# EAGLE board mixer (EAGLE 9.6.2)

Size 142 x 128.03 mm. Coordinates in mm from the lower left corner, seen from the top.
Outline: 4,128 137,128 arc-90 142,124 142,4 arc-90 138,0 126,0 arc-90 122,4 122,14 arc90 118,18 66,18 arc90 62,14 62,4 arc-90 58,0 4,0 arc-90 0,4 0,124 arc-90 4,128
Copper layers (1*16): Top 0.035mm / dielectric 1.5mm / Bottom 0.035mm
Design rules "default": minimum track width 6mil, minimum drill 0.35mm, track to track 6mil, track to pad 6mil, pad to pad 6mil, via to via 6mil, smd to smd 6mil, copper to edge 40mil, drill to drill 6mil, minimum pad ring 10mil, minimum via ring 8mil, stop-mask expansion 4mil, vias tented up to drill 0mil, thermal gap 10mil

## Footprints (pad centres in the part's own frame; a part is rotated, then mirrored left to right if it is on the bottom)
RK09L124000Z = drill 0.6 square: P$1 -2.5,0 | drill 0.6: P$2 0,0; P$3 2.5,0; P$6 -2.5,-2.54; P$7 0,-2.54; P$8 2.5,-2.54 | drill 2: P$4 -5.65,7.5; P$5 5.65,7.5
E2,0-6 = drill 0.813 long: + -0.953,0; - 0.953,0
E2,0-5 = drill 0.813 long: + -0.953,0; - 0.953,0
C025-025X050 = drill 0.813 octagon: 1 -1.27,0; 2 1.27,0
RK09L1140 = drill 0.6 square: P$1 -2.5,0 | drill 0.6: P$2 0,0; P$3 2.5,0 | drill 2: P$4 -5.65,7.5; P$5 5.65,7.5
RJ9W = drill 0.813 long: A 2.54,0.635; E -2.54,0.635; S 0,0.635
HOT_COLD = drill 0.6 square: P$1 -2.54,0 | drill 0.6: P$2 0,0; P$3 2.54,0
0204/7 = drill 0.813 octagon: 1 -3.81,0; 2 3.81,0
DIP762W53P254L1969H508Q14B = drill 0.743 pad 1.343: 1 -3.81,7.62; 2 -3.81,5.08; 3 -3.81,2.54; 4 -3.81,0; 5 -3.81,-2.54; 6 -3.81,-5.08; 7 -3.81,-7.62; 8 3.81,-7.62; 9 3.81,-5.08; 10 3.81,-2.54; 11 3.81,0; 12 3.81,2.54; 13 3.81,5.08; 14 3.81,7.62
SND_RET = drill 0.6 square: P$1 -2.54,0 | drill 0.6: P$2 0,0; P$3 2.54,0
3-HOLES = drill 0.6 square: P$1 -2.54,0 | drill 0.6: P$2 0,0; P$3 2.54,0
E5,0-12,5 = drill 1.016 pad 2.184: + -2.54,0 | drill 1.016 pad 2.184 octagon: - 2.54,0
DO41-10 = drill 1.118: A 5.08,0; C -5.08,0
DUOLED-A-5MM = drill 0.813 long: A 0,0; CR 2.54,0; CX -2.54,0
LEFT_RIGHT = drill 0.6 square: P$1 -2.54,0 | drill 0.6: P$2 0,0; P$3 2.54,0
PWR = drill 0.6 square: P$1 -1.27,0 | drill 0.6: P$2 1.27,0
LEFT_RIGHT_BYPASS = drill 0.6: BPSL 5.08,0; BPSR 7.62,0; LEFT 0,0; RIGHT 2.54,0 | drill 0.6 square: GND -2.54,0
CONV_V7809W-500R = drill 1.1 square: 1 -10.1,2.54 | drill 1.1: 2 -10.1,0; 3 -10.1,-2.54
BALANCED_INPUT_JACK = drill 0.6: GND 1.27,0 | drill 0.6 square: HOT -1.27,0
DIP762W53P254L2591H508Q20B = drill 0.743 pad 1.343: D1 -3.81,6.35; D2 -3.81,-6.35; D3 3.81,-6.35; D4 3.81,6.35; GND -3.81,-1.27; IN2 -3.81,-11.43; IN3 3.81,-11.43; IN4 3.81,11.43; NC 3.81,-1.27; S1A -3.81,8.89; S1B -3.81,3.81; S2A -3.81,-8.89; S2B -3.81,-3.81; S3A 3.81,-8.89; S3B 3.81,-3.81; S4A 3.81,8.89; S4B 3.81,3.81; VDD 3.81,1.27; VSS -3.81,1.27 | drill 0.743 pad 1.343 square: IN1 -3.81,11.43
DIP762W53P254L2006H508Q16B = drill 0.743 pad 1.343: D1 -3.81,3.81; D2 3.81,-3.81; GND -3.81,-3.81; IN2 3.81,-8.89; NC1 -3.81,-6.35; NC2 -3.81,-8.89; NC3 3.81,3.81; NC4 3.81,6.35; NC5 3.81,8.89; S1A -3.81,6.35; S1B -3.81,1.27; S2A 3.81,-6.35; S2B 3.81,-1.27; VDD 3.81,1.27; VSS -3.81,-1.27 | drill 0.743 pad 1.343 square: IN1 -3.81,8.89
SBC1-102-211 = drill 0.6 square: P$1 -1.27,0 | drill 0.6: P$2 1.27,0

## Placement (x,y rotation side)
1:BLEND  50 k  [RK09L124000Z]  23.05,72.05 0 top
1:C1  10u, 63V  [E2,0-6]  44.45,184.12 270 bottom  (outside the outline)
1:C2  10u, 63V  [E2,0-6]  52.09,184 270 bottom  (outside the outline)
1:C3  10u  [E2,0-5]  58.17,163.17 90 bottom  (outside the outline)
1:C4  18 p  [C025-025X050]  12.68,144.78 180 bottom  (outside the outline)
1:C5  10u  [E2,0-5]  60.71,169.52 90 bottom  (outside the outline)
1:C6  10u  [E2,0-5]  11.53,180.31 180 bottom  (outside the outline)
1:C7  10u  [E2,0-5]  17.73,180.32 0 bottom  (outside the outline)
1:C8  10u  [E2,0-5]  4.27,166.35 0 bottom  (outside the outline)
1:C9  10u  [E2,0-5]  -1.8,166.39 180 bottom  (outside the outline)
1:C10  10u  [E2,0-5]  30.63,142.26 180 bottom  (outside the outline)
1:C11  100 n  [C025-025X050]  7.64,151.08 0 bottom  (outside the outline)
1:C12  10u  [E2,0-5]  12.67,135.84 0 bottom  (outside the outline)
1:C17  18 p  [C025-025X050]  0.58,180.36 180 bottom  (outside the outline)
1:C19  18 p  [C025-025X050]  29.79,157.45 270 bottom  (outside the outline)
1:GAIN  10 k  [RK09L1140]  23.01,96.01 0 top
1:GAIN1  500 k  [RJ9W]  12.04,70 180 top
1:GAIN2  500 k  [RJ9W]  12.04,63.98 180 top
1:IN  HOT_COLD  [HOT_COLD]  80.05,112.01 0 bottom
1:LEVEL  RK09L1140  [RK09L1140]  22.97,24.01 0 top
1:R8  100 k  [0204/7]  13.92,185.35 0 bottom  (outside the outline)
1:R9  100 k  [0204/7]  0,171.45 0 bottom  (outside the outline)
1:R10  100 k  [0204/7]  -1.29,157.48 90 bottom  (outside the outline)
1:R11  47 k  [0204/7]  0.61,177.8 180 bottom  (outside the outline)
1:R12  1 k  [0204/7]  1.25,157.48 90 bottom  (outside the outline)
1:R13  2.2 k  [0204/7]  26.67,143.51 270 bottom  (outside the outline)
1:R14  47 k  [0204/7]  22.86,157.45 270 bottom  (outside the outline)
1:R15  2.2 k  [0204/7]  20.34,137.16 0 bottom  (outside the outline)
1:R16  100 k  [0204/7]  63.45,156.21 90 bottom  (outside the outline)
1:R17  100 k  [0204/7]  65.99,156.21 90 bottom  (outside the outline)
1:R18  1 k  [0204/7]  26.67,151.15 180 bottom  (outside the outline)
1:R19  10 k  [0204/7]  12.7,147.35 0 bottom  (outside the outline)
1:R20  10 k  [0204/7]  12.72,142.22 0 bottom  (outside the outline)
1:R21  10 k  [0204/7]  10.14,158.8 90 bottom  (outside the outline)
1:R22  10 k  [0204/7]  10.18,168.91 270 bottom  (outside the outline)
1:R23  100 k  [0204/7]  53.34,175.26 0 bottom  (outside the outline)
1:R24  100 k  [0204/7]  53.34,177.8 0 bottom  (outside the outline)
1:R25  4.7 k  [0204/7]  65.52,180.21 270 bottom  (outside the outline)
1:R26  1 k  [0204/7]  14.02,175.29 0 bottom  (outside the outline)
1:R27  4.7 k  [0204/7]  62.96,180.2 270 bottom  (outside the outline)
1:U1  TL074  [DIP762W53P254L1969H508Q14B]  49.5,120.65 270 bottom
1:U2  SEND_RETURN  [SND_RET]  29.91,95.13 90 bottom
2:BLEND  50 k  [RK09L124000Z]  54.95,71.93 0 top
2:C1  10u, 63V  [E2,0-6]  76.2,105.33 270 bottom
2:C2  10u, 63V  [E2,0-6]  86.97,105.36 270 bottom
2:C3  10u  [E2,0-5]  73.66,95.25 90 bottom
2:C4  18 p  [C025-025X050]  93.98,106.66 0 bottom
2:C5  10u  [E2,0-5]  79.99,95.28 90 bottom
2:C6  10u  [E2,0-5]  96.52,100.36 90 bottom
2:C7  10u  [E2,0-5]  102.87,102.87 270 bottom
2:C8  10u  [E2,0-5]  35.81,65.43 270 bottom
2:C9  10u  [E2,0-5]  35.81,71.78 270 bottom
2:C10  10u  [E2,0-5]  43.1,77.52 0 bottom
2:C11  100 n  [C025-025X050]  71.09,121.94 180 bottom
2:C12  10u  [E2,0-5]  43.18,54.61 0 bottom
2:C17  18 p  [C025-025X050]  71.12,119.38 0 bottom
2:C19  18 p  [C025-025X050]  -84.43,92.46 0 bottom  (outside the outline)
2:GAIN  10 k  [RK09L1140]  55.01,95.99 0 top
2:GAIN1  500 k  [RJ9W]  43.94,70.03 180 top
2:GAIN2  500 k  [RJ9W]  43.94,64.02 180 top
2:IN  HOT_COLD  [HOT_COLD]  107.05,112.09 0 bottom
2:LEVEL  RK09L1140  [RK09L1140]  54.97,23.99 0 top
2:R8  100 k  [0204/7]  100.33,111.76 270 bottom
2:R9  100 k  [0204/7]  32.99,59.69 180 bottom
2:R10  100 k  [0204/7]  67.31,113.01 0 bottom
2:R11  47 k  [0204/7]  67.31,121.92 270 bottom
2:R12  1 k  [0204/7]  67.31,115.55 0 bottom
2:R13  2.2 k  [0204/7]  43.18,72.39 180 bottom
2:R14  47 k  [0204/7]  -174.6,122.94 0 bottom  (outside the outline)
2:R15  2.2 k  [0204/7]  43.18,59.67 0 bottom
2:R16  100 k  [0204/7]  67.31,105.43 180 bottom
2:R17  100 k  [0204/7]  67.31,102.89 180 bottom
2:R18  1 k  [0204/7]  -133.96,122.94 0 bottom  (outside the outline)
2:R19  10 k  [0204/7]  94.01,111.73 180 bottom
2:R20  10 k  [0204/7]  94,109.22 0 bottom
2:R21  10 k  [0204/7]  93.95,114.3 180 bottom
2:R22  10 k  [0204/7]  80.03,114.28 0 bottom
2:R23  100 k  [0204/7]  74.93,100.33 180 bottom
2:R24  100 k  [0204/7]  86.36,100.33 0 bottom
2:R25  4.7 k  [0204/7]  67.31,110.49 180 bottom
2:R26  1 k  [0204/7]  68.6,96.52 270 bottom
2:R27  4.7 k  [0204/7]  67.31,107.95 180 bottom
2:U1  TL074  [DIP762W53P254L1969H508Q14B]  83.82,120.7 270 bottom
2:U2  SEND_RETURN  [SND_RET]  29.99,67.93 90 bottom
3:BLEND  50 k  [RK09L124000Z]  87.05,72.01 0 top
3:C1  10u, 63V  [E2,0-6]  129.54,106.6 270 bottom
3:C2  10u, 63V  [E2,0-6]  137.21,106.63 270 bottom
3:C3  10u  [E2,0-5]  127,99.03 90 bottom
3:C4  18 p  [C025-025X050]  128.55,115.59 270 bottom
3:C5  10u  [E2,0-5]  138.18,99.14 90 bottom
3:C6  10u  [E2,0-5]  119.99,111.76 0 bottom
3:C7  10u  [E2,0-5]  113.64,111.76 0 bottom
3:C8  10u  [E2,0-5]  35.53,38.05 270 bottom
3:C9  10u  [E2,0-5]  35.56,44.37 270 bottom
3:C10  10u  [E2,0-5]  74.9,77.47 0 bottom
3:C11  100 n  [C025-025X050]  99.06,121.92 180 bottom
3:C12  10u  [E2,0-5]  74.93,54.61 0 bottom
3:C17  18 p  [C025-025X050]  99.06,119.33 0 bottom
3:C19  18 p  [C025-025X050]  128.55,120.65 270 bottom
3:GAIN  10 k  [RK09L1140]  87.01,95.97 0 top
3:GAIN1  500 k  [RJ9W]  75.94,70.06 180 top
3:GAIN2  500 k  [RJ9W]  75.94,64.05 180 top
3:IN  HOT_COLD  [HOT_COLD]  134.05,111.97 0 bottom
3:LEVEL  RK09L1140  [RK09L1140]  86.97,24.07 0 top
3:R8  100 k  [0204/7]  124.46,110.52 90 bottom
3:R9  100 k  [0204/7]  39.98,40.69 90 bottom
3:R10  100 k  [0204/7]  120.63,102.84 90 bottom
3:R11  47 k  [0204/7]  95.25,120.65 90 bottom
3:R12  1 k  [0204/7]  118.09,102.84 90 bottom
3:R13  2.2 k  [0204/7]  74.91,72.39 180 bottom
3:R14  47 k  [0204/7]  133.38,124.48 180 bottom
3:R15  2.2 k  [0204/7]  74.9,59.59 0 bottom
3:R16  100 k  [0204/7]  139.09,118.11 270 bottom
3:R17  100 k  [0204/7]  136.52,118.11 270 bottom
3:R18  1 k  [0204/7]  106.68,114.27 180 bottom
3:R19  10 k  [0204/7]  125.75,120.62 270 bottom
3:R20  10 k  [0204/7]  43.18,175.26 180 bottom  (outside the outline)
3:R21  10 k  [0204/7]  123.19,120.65 90 bottom
3:R22  10 k  [0204/7]  106.68,104.14 270 bottom
3:R23  100 k  [0204/7]  131.42,99.01 90 bottom
3:R24  100 k  [0204/7]  133.99,99.01 90 bottom
3:R25  4.7 k  [0204/7]  133.98,118.11 270 bottom
3:R26  1 k  [0204/7]  109.24,104.14 270 bottom
3:R27  4.7 k  [0204/7]  131.47,118.11 270 bottom
3:U1  TL074  [DIP762W53P254L1969H508Q14B]  111.83,120.6 270 bottom
3:U2  SEND_RETURN  [SND_RET]  30.07,41.03 90 bottom
BLEND1  50 k  [RK09L124000Z]  119,72.02 0 top
BYPASS  BUTTON  [3-HOLES]  108.77,22.03 0 top
C1  10u  [E2,0-5]  -100.94,242.32 0 bottom  (outside the outline)
C2  10u  [E2,0-5]  -90.78,242.32 0 bottom  (outside the outline)
C3  10u  [E2,0-5]  -80.62,242.32 0 bottom  (outside the outline)
C4  10u  [E2,0-5]  -70.46,242.32 0 bottom  (outside the outline)
C5  10u  [E2,0-5]  -203.81,248.67 0 bottom  (outside the outline)
C6  10u, 63V  [E2,0-6]  -107.29,225.81 0 bottom  (outside the outline)
C7  10u, 63V  [E2,0-6]  -92.05,225.81 0 bottom  (outside the outline)
C8  10u  [E2,0-5]  -193.65,248.67 0 bottom  (outside the outline)
C9  10u  [E2,0-5]  -183.49,248.67 0 bottom  (outside the outline)
C10  10u  [E2,0-5]  -74.27,234.7 0 bottom  (outside the outline)
C11  10u  [E2,0-5]  -111.1,242.32 0 bottom  (outside the outline)
C12  10u, 63V  [E2,0-6]  -76.81,225.81 0 bottom  (outside the outline)
C13  10u  [E2,0-5]  -64.11,234.7 0 bottom  (outside the outline)
C14  10u  [E2,0-5]  -202.54,242.32 0 bottom  (outside the outline)
C15  10u  [E2,0-5]  -192.38,242.32 0 bottom  (outside the outline)
C16  10u  [E2,0-5]  -182.22,242.32 0 bottom  (outside the outline)
C17  18 p  [C025-025X050]  -109.83,234.7 0 bottom  (outside the outline)
C18  10u  [E2,0-5]  -172.06,242.32 0 bottom  (outside the outline)
C19  18 p  [C025-025X050]  -103.48,234.7 0 bottom  (outside the outline)
C20  10u  [E2,0-5]  -161.9,242.32 0 bottom  (outside the outline)
C21  10u, 63V  [E2,0-6]  -197.46,234.7 0 bottom  (outside the outline)
C22  10u  [E2,0-5]  -151.74,242.32 0 bottom  (outside the outline)
C23  10u, 63V  [E2,0-6]  -182.22,234.7 0 bottom  (outside the outline)
C24  10u, 63V  [E2,0-6]  -166.98,234.7 0 bottom  (outside the outline)
C25  10u, 63V  [E2,0-6]  -151.74,234.7 0 bottom  (outside the outline)
C26  10u  [E2,0-5]  -141.58,242.32 0 bottom  (outside the outline)
C27  2.2u, 63V  [E2,0-6]  -139.04,225.81 0 bottom  (outside the outline)
C28  100 n  [C025-025X050]  -122.53,234.7 0 bottom  (outside the outline)
C29  100 n  [C025-025X050]  -116.18,234.7 0 bottom  (outside the outline)
C30  2.2u, 63V  [E2,0-6]  -122.53,225.81 0 bottom  (outside the outline)
C31  390 u / 63 V  [E5,0-12,5]  42.3,22.35 180 bottom
C32  10u, 63V  [E2,0-6]  -136.5,234.7 0 bottom  (outside the outline)
C33  10u  [E2,0-5]  -131.42,242.32 0 bottom  (outside the outline)
C34  18 p  [C025-025X050]  -97.13,234.7 0 bottom  (outside the outline)
C35  18 p  [C025-025X050]  -90.78,234.7 0 bottom  (outside the outline)
C36  10u  [E2,0-5]  -121.26,242.32 0 bottom  (outside the outline)
C37  100 n  [C025-025X050]  -64.11,-4.06 0 bottom  (outside the outline)
C38  18 p  [C025-025X050]  -84.43,234.7 0 bottom  (outside the outline)
D1  1N4004  [DO41-10]  -67.92,11.18 0 bottom  (outside the outline)
D2  1N4004  [DO41-10]  -67.92,3.56 0 bottom  (outside the outline)
GAIN1  500 k  [RJ9W]  107.94,70.08 180 top
GAIN2  500 k  [RJ9W]  107.94,64 180 top
GAIN3  500 k  [RJ9W]  129.96,70.03 0 top
GAIN4  500 k  [RJ9W]  129.96,64.06 0 top
GAIN5  10 k  [RJ9W]  129.9,86 0 top
LD1  [DUOLED-A-5MM]  -155.55,225.81 0 bottom  (outside the outline)
LOOPMASTER  SEND_RETURN  [SND_RET]  29.97,14.06 90 bottom
MON_IN  HOT_COLD  [HOT_COLD]  111.97,41.1 90 bottom
MON_OUT  LEFT_RIGHT  [LEFT_RIGHT]  57.67,8.92 270 top
MON_THROUGH  HOT_COLD  [HOT_COLD]  106.47,29.48 90 bottom
MONO  BUTTON  [3-HOLES]  76.49,24.03 0 top
OUT_L  HOT_COLD  [HOT_COLD]  108.07,82.04 90 bottom
OUT_R  HOT_COLD  [HOT_COLD]  108.07,94.92 90 bottom
PWR$1  PWR  [PWR]  5.69,112.1 0 bottom
R1  10 k  [0204/7]  -73,247.4 0 bottom  (outside the outline)
R2  10 k  [0204/7]  -205.08,253.75 0 bottom  (outside the outline)
R3  10 k  [0204/7]  -194.92,253.75 0 bottom  (outside the outline)
R4  10 k  [0204/7]  -184.76,253.75 0 bottom  (outside the outline)
R5  100  [0204/7]  -174.6,253.75 0 bottom  (outside the outline)
R6  10 k  [0204/7]  -164.44,253.75 0 bottom  (outside the outline)
R7  100  [0204/7]  -154.28,253.75 0 bottom  (outside the outline)
R8  100 k  [0204/7]  -144.12,253.75 0 bottom  (outside the outline)
R9  100 k  [0204/7]  -133.96,253.75 0 bottom  (outside the outline)
R10  100 k  [0204/7]  -123.8,253.75 0 bottom  (outside the outline)
R11  47 k  [0204/7]  -113.64,253.75 0 bottom  (outside the outline)
R12  1 k  [0204/7]  -103.48,253.75 0 bottom  (outside the outline)
R13  2.2 k  [0204/7]  -93.32,253.75 0 bottom  (outside the outline)
R14  47 k  [0204/7]  -83.16,253.75 0 bottom  (outside the outline)
R15  2.2 k  [0204/7]  -73,253.75 0 bottom  (outside the outline)
R16  100 k  [0204/7]  -205.08,258.83 0 bottom  (outside the outline)
R17  100 k  [0204/7]  -194.92,258.83 0 bottom  (outside the outline)
R18  1 k  [0204/7]  -184.76,258.83 0 bottom  (outside the outline)
R19  100 k  [0204/7]  -174.6,258.83 0 bottom  (outside the outline)
R20  100 k  [0204/7]  -164.44,258.83 0 bottom  (outside the outline)
R21  10 k  [0204/7]  -154.28,258.83 0 bottom  (outside the outline)
R22  10 k  [0204/7]  -144.12,258.83 0 bottom  (outside the outline)
R23  100 k  [0204/7]  -133.96,258.83 0 bottom  (outside the outline)
R24  100 k  [0204/7]  -123.8,258.83 0 bottom  (outside the outline)
R25  10 k  [0204/7]  -113.64,258.83 0 bottom  (outside the outline)
R26  10 k  [0204/7]  -103.48,258.83 0 bottom  (outside the outline)
R27  10 k  [0204/7]  -93.32,258.83 0 bottom  (outside the outline)
R28  100  [0204/7]  -83.16,258.83 0 bottom  (outside the outline)
R29  100  [0204/7]  -73,258.83 0 bottom  (outside the outline)
R30  100 k  [0204/7]  -205.08,263.91 0 bottom  (outside the outline)
R31  100 k  [0204/7]  -194.92,263.91 0 bottom  (outside the outline)
R32  10 k  [0204/7]  -184.76,263.91 0 bottom  (outside the outline)
R33  10 k  [0204/7]  -174.6,263.91 0 bottom  (outside the outline)
R34  10 k  [0204/7]  -164.44,263.91 0 bottom  (outside the outline)
R35  10 k  [0204/7]  -154.28,263.91 0 bottom  (outside the outline)
R36  10 k  [0204/7]  -144.12,263.91 0 bottom  (outside the outline)
R37  100  [0204/7]  -133.96,263.91 0 bottom  (outside the outline)
R38  100  [0204/7]  -123.8,263.91 0 bottom  (outside the outline)
R39  100 k  [0204/7]  -113.64,263.91 0 bottom  (outside the outline)
R40  100 k  [0204/7]  -103.48,263.91 0 bottom  (outside the outline)
R41  4.7 k  [0204/7]  -93.32,263.91 0 bottom  (outside the outline)
R42  4.7 k  [0204/7]  -83.16,263.91 0 bottom  (outside the outline)
R43  4.7 k  [0204/7]  -73,263.91 0 bottom  (outside the outline)
R44  4.7 k  [0204/7]  -205.08,268.99 0 bottom  (outside the outline)
R45  10 k  [0204/7]  -194.92,268.99 0 bottom  (outside the outline)
R46  10 k  [0204/7]  -184.76,268.99 0 bottom  (outside the outline)
R47  100 k  [0204/7]  -174.6,268.99 0 bottom  (outside the outline)
R48  100 k  [0204/7]  -164.44,268.99 0 bottom  (outside the outline)
R49  100 k  [0204/7]  -154.28,268.99 0 bottom  (outside the outline)
R50  100 k  [0204/7]  -144.12,268.99 0 bottom  (outside the outline)
R51  10 k  [0204/7]  -133.96,268.99 0 bottom  (outside the outline)
R52  10 k  [0204/7]  -123.8,268.99 0 bottom  (outside the outline)
R53  10 k  [0204/7]  -113.64,268.99 0 bottom  (outside the outline)
R54  10 k  [0204/7]  -103.48,268.99 0 bottom  (outside the outline)
R55  47 k  [0204/7]  -93.32,268.99 0 bottom  (outside the outline)
R56  1 k  [0204/7]  -83.16,268.99 0 bottom  (outside the outline)
R57  4.7 k  [0204/7]  -73,268.99 0 bottom  (outside the outline)
R58  4.7 k  [0204/7]  -205.08,274.07 0 bottom  (outside the outline)
R59  2.2 k  [0204/7]  -194.92,274.07 0 bottom  (outside the outline)
R60  1 k  [0204/7]  -184.76,274.07 0 bottom  (outside the outline)
R61  47 k  [0204/7]  -174.6,274.07 0 bottom  (outside the outline)
R62  2.2 k  [0204/7]  -164.44,274.07 0 bottom  (outside the outline)
R63  1 k  [0204/7]  -154.28,274.07 0 bottom  (outside the outline)
R64  10 k  [0204/7]  -144.12,274.07 0 bottom  (outside the outline)
R65  10 k  [0204/7]  -133.96,274.07 0 bottom  (outside the outline)
TC_RET  LEFT_RIGHT_BYPASS  [LEFT_RIGHT_BYPASS]  27.9,111.87 0 bottom
TC_SEND_JACK  HOT_COLD  [HOT_COLD]  54.64,111.97 0 bottom
U1  TL074  [DIP762W53P254L1969H508Q14B]  -194.92,186.44 0 bottom  (outside the outline)
U2  TL074  [DIP762W53P254L1969H508Q14B]  -184.76,186.44 0 bottom  (outside the outline)
U3  TL074  [DIP762W53P254L1969H508Q14B]  -43.76,149.61 0 bottom  (outside the outline)
U4  TL074  [DIP762W53P254L1969H508Q14B]  -174.6,186.44 0 bottom  (outside the outline)
U5  TL074  [DIP762W53P254L1969H508Q14B]  -164.44,186.44 0 bottom  (outside the outline)
U6  TL074  [DIP762W53P254L1969H508Q14B]  -154.28,186.44 0 bottom  (outside the outline)
U7  TL074  [DIP762W53P254L1969H508Q14B]  -144.12,186.44 0 bottom  (outside the outline)
U8  TL074  [DIP762W53P254L1969H508Q14B]  -133.96,186.44 0 bottom  (outside the outline)
U9  V7809W-500R  [CONV_V7809W-500R]  45.14,9.04 180 bottom
U$1  UTBULT_DESIGN3  [UD_3]  129.74,14.01 0 top
U$2  UNBALANCED_INPUT_JACK  [BALANCED_INPUT_JACK]  -184.15,-88.9 0 top  (outside the outline)
U$5  ADG333ABNZADG333ABNZ  [DIP762W53P254L2591H508Q20B]  -205.08,187.71 0 bottom  (outside the outline)
U$6  ADG436BNZADG436BNZ  [DIP762W53P254L2006H508Q16B]  -123.8,185.17 0 bottom  (outside the outline)
U$10  SBC1-102-211  [SBC1-102-211]  -130.15,233.43 0 bottom  (outside the outline)
VOLUM6  50 k  [RK09L124000Z]  118.96,48.02 0 top
VOLUME1  50 k  [RK09L124000Z]  118.98,24.03 0 top
VOLUME2  10 k  [RK09L1140]  54.97,47.99 0 top
VOLUME3  10 k  [RK09L1140]  87.03,47.99 0 top
VOLUME4  10 k  [RK09L1140]  22.99,47.99 0 top
VOLUME5  10 k  [RK09L1140]  118.95,95.99 0 top

## Library data of the parts
1:BLEND 2:BLEND 3:BLEND BLEND1 VOLUME1 = passives; LINK: https://www.mouser.se/ProductDetail/Alps-Alpine/RK09L124000Z?qs=fQ8kcZGzY5XvGyzlPd%2FK1w%3D%3D
1:C1-1:C3 1:C5-1:C10 1:C12 1:GAIN 1:GAIN1 1:GAIN2 1:LEVEL 2:C1-2:C3 2:C5-2:C10 2:C12 2:GAIN 2:GAIN1 2:GAIN2 2:LEVEL 3:C1-3:C3 3:C5-3:C10 3:C12 3:GAIN 3:GAIN1 3:GAIN2 3:LEVEL C1-C16 C18 C20-C27 C30-C33 C36 D1 D2 GAIN1-GAIN5 LD1 U$10 VOLUM6 VOLUME2-VOLUME5 = passives
1:C4 1:C11 1:C17 1:C19 2:C4 2:C11 2:C17 2:C19 3:C4 3:C11 3:C17 3:C19 C17 C19 C28 C29 C34 C35 C37 C38 = passives; SPICEPREFIX: C
1:IN 1:U2 2:IN 2:U2 3:IN 3:U2 BYPASS LOOPMASTER MON_IN MON_OUT MON_THROUGH MONO OUT_L OUT_R PWR$1 TC_RET TC_SEND_JACK U$2 = connectors
1:R8-1:R27 2:R8-2:R27 3:R8-3:R27 R1-R65 = passives; SPICEPREFIX: R
1:U1 2:U1 3:U1 U1-U8 = ic; LINK: https://eu.mouser.com/ProductDetail/Texas-Instruments/TL074CN?qs=%2Fha2pyFadui04%2FQQ4Z%2F%252B8cpHvrlLCfjGhhp9sdrT5Zo%3D; MPN: TL074CN; SUPPLIER: Mouser
U9 = power; LINK: https://eu.mouser.com/ProductDetail/CUI-Inc/V7809W-500R?qs=WyjlAZoYn50ZQqVm%2FTcinw%3D%3D; MPN: V7809W-500R; SUPPLIER: Mouser
U$1 = misc
U$5 = ic; LINK: https://www.mouser.se/ProductDetail/Analog-Devices/ADG333ABNZ?qs=BpaRKvA4VqF%252BfFFtqT1yFg%3D%3D; MPN: ADG333ABNZ; SUPPLIER: Mouser
U$6 = ic

## Nets
1:COLD_IN: 1:C1.+ 1:IN.P$3 1:R27.2
1:COLD_SEND: 1:C3.+ 1:R16.2 1:U1.10
1:HOT_IN: 1:C2.+ 1:IN.P$2 1:R25.2
1:HOT_SEND: 1:C5.+ 1:R17.2 1:U1.12
1:N$1: 1:C10.+ 1:R13.2
1:N$2: 1:C12.+ 1:R15.2
1:N$3: 1:GAIN1.A 1:GAIN1.S 1:R13.1
1:N$4: 1:GAIN2.A 1:GAIN2.S 1:R15.1
1:N$9: 1:GAIN.P$3 1:R19.2 1:R20.2 1:R21.1 1:U1.8 1:U1.9
1:N$11: 1:C4.1 1:R19.1
1:N$12: 1:C4.2 1:R20.1 1:R22.2 1:R26.1 1:U1.13
1:N$14: 1:C1.- 1:C3.- 1:R23.2
1:N$15: 1:C2.- 1:C5.- 1:R24.2
1:N$17: 1:GAIN.P$2 1:R26.2
1:N$23: 1:C6.- 1:C7.- 1:R8.2
1:N$24: 1:C11.1 1:U1.11
1:N$25: 1:C6.+ 1:U2.P$3
1:N$26: 1:C8.- 1:C9.- 1:R9.2
1:N$27: 1:C8.+ 1:U2.P$2
1:N$28: 1:C9.+ 1:R10.2 1:R12.2
1:N$29: 1:C17.2 1:GAIN1.E 1:R11.2 1:U1.2
1:N$30: 1:C19.2 1:GAIN2.E 1:R14.2 1:U1.6
1:N$33: 1:R12.1 1:U1.3
1:N$36: 1:R18.1 1:U1.5
1:N$37: 1:BLEND.P$8 1:C19.1 1:R14.1 1:U1.7
1:SND_RET_OUT: 1:BLEND.P$1 1:C17.1 1:R11.1 1:U1.1
2:COLD_IN: 2:C1.+ 2:IN.P$3 2:R27.2
2:COLD_SEND: 2:C3.+ 2:R16.2 2:U1.10
2:HOT_IN: 2:C2.+ 2:IN.P$2 2:R25.2
2:HOT_SEND: 2:C5.+ 2:R17.2 2:U1.12
2:N$1: 2:C10.+ 2:R13.2
2:N$2: 2:C12.+ 2:R15.2
2:N$3: 2:GAIN1.A 2:GAIN1.S 2:R13.1
2:N$4: 2:GAIN2.A 2:GAIN2.S 2:R15.1
2:N$9: 2:GAIN.P$3 2:R19.2 2:R20.2 2:R21.1 2:U1.8 2:U1.9
2:N$11: 2:C4.1 2:R19.1
2:N$12: 2:C4.2 2:R20.1 2:R22.2 2:R26.1 2:U1.13
2:N$14: 2:C1.- 2:C3.- 2:R23.2
2:N$15: 2:C2.- 2:C5.- 2:R24.2
2:N$17: 2:GAIN.P$2 2:R26.2
2:N$23: 2:C6.- 2:C7.- 2:R8.2
2:N$24: 2:C11.1 2:U1.11
2:N$25: 2:C6.+ 2:U2.P$3
2:N$26: 2:C8.- 2:C9.- 2:R9.2
2:N$27: 2:C8.+ 2:U2.P$2
2:N$28: 2:C9.+ 2:R10.2 2:R12.2
2:N$29: 2:C17.2 2:GAIN1.E 2:R11.2 2:U1.2
2:N$30: 2:C19.2 2:GAIN2.E 2:R14.2 2:U1.6
2:N$33: 2:R12.1 2:U1.3
2:N$36: 2:R18.1 2:U1.5
2:N$37: 2:BLEND.P$8 2:C19.1 2:R14.1 2:U1.7
2:SND_RET_OUT: 2:BLEND.P$1 2:C17.1 2:R11.1 2:U1.1
3:COLD_IN: 3:C1.+ 3:IN.P$3 3:R27.2
3:COLD_SEND: 3:C3.+ 3:R16.2 3:U1.10
3:HOT_IN: 3:C2.+ 3:IN.P$2 3:R25.2
3:HOT_SEND: 3:C5.+ 3:R17.2 3:U1.12
3:N$1: 3:C10.+ 3:R13.2
3:N$2: 3:C12.+ 3:R15.2
3:N$3: 3:GAIN1.A 3:GAIN1.S 3:R13.1
3:N$4: 3:GAIN2.A 3:GAIN2.S 3:R15.1
3:N$9: 3:GAIN.P$3 3:R19.2 3:R20.2 3:R21.1 3:U1.8 3:U1.9
3:N$11: 3:C4.1 3:R19.1
3:N$12: 3:C4.2 3:R20.1 3:R22.2 3:R26.1 3:U1.13
3:N$14: 3:C1.- 3:C3.- 3:R23.2
3:N$15: 3:C2.- 3:C5.- 3:R24.2
3:N$17: 3:GAIN.P$2 3:R26.2
3:N$23: 3:C6.- 3:C7.- 3:R8.2
3:N$24: 3:C11.1 3:U1.11
3:N$25: 3:C6.+ 3:U2.P$3
3:N$26: 3:C8.- 3:C9.- 3:R9.2
3:N$27: 3:C8.+ 3:U2.P$2
3:N$28: 3:C9.+ 3:R10.2 3:R12.2
3:N$29: 3:C17.2 3:GAIN1.E 3:R11.2 3:U1.2
3:N$30: 3:C19.2 3:GAIN2.E 3:R14.2 3:U1.6
3:N$33: 3:R12.1 3:U1.3
3:N$36: 3:R18.1 3:U1.5
3:N$37: 3:BLEND.P$8 3:C19.1 3:R14.1 3:U1.7
3:SND_RET_OUT: 3:BLEND.P$1 3:C17.1 3:R11.1 3:U1.1
+9V: 1:C11.2 1:U1.4 2:C11.2 2:U1.4 3:C11.2 3:U1.4 C29.1 D1.C D2.C R45.1 R64.2 R65.1 U1.4 U2.4 U3.4 U4.4 U5.4 U6.4 U7.4 U8.4 U$5.VDD U$6.VDD
+48V: 1:R25.1 1:R27.1 2:R25.1 2:R27.1 3:R25.1 3:R27.1 C30.+ C31.+ R41.1 R42.1 R43.1 R44.1 R57.1 R58.1 U$10.P$2
COLD_SEND: C11.+ R47.2 U4.3
DRY1: 1:C7.+ 1:R18.2 1:R22.1 1:U1.14 U$5.S1B VOLUME2.P$3
DRY2: 2:C7.+ 2:R18.2 2:R22.1 2:U1.14 U$5.S2B VOLUME3.P$3
DRY3: 3:C7.+ 3:R18.2 3:R22.1 3:U1.14 U$5.S3B VOLUME4.P$3
GND: 1:BLEND.P$4 1:BLEND.P$5 1:C10.- 1:C12.- 1:GAIN.P$4 1:GAIN.P$5 1:IN.P$1 1:LEVEL.P$4 1:LEVEL.P$5 1:R8.1 1:R9.1 1:R23.1 1:R24.1 1:U2.P$1 2:BLEND.P$4 2:BLEND.P$5 2:C10.- 2:C12.- 2:GAIN.P$4 2:GAIN.P$5 2:IN.P$1 2:LEVEL.P$4 2:LEVEL.P$5 2:R8.1 2:R9.1 2:R23.1 2:R24.1 2:U2.P$1 3:BLEND.P$4 3:BLEND.P$5 3:C10.- 3:C12.- 3:GAIN.P$4 3:GAIN.P$5 3:IN.P$1 3:LEVEL.P$4 3:LEVEL.P$5 3:R8.1 3:R9.1 3:R23.1 3:R24.1 3:U2.P$1 BLEND1.P$4 BLEND1.P$5 BYPASS.P$3 C18.- C20.- C27.- C28.2 C29.2 C30.- C31.- C33.- C36.- C37.2 LD1.A LOOPMASTER.P$1 MON_IN.P$1 MON_OUT.P$1 MON_THROUGH.P$1 OUT_L.P$1 OUT_R.P$1 PWR$1.P$2 R8.1 R9.1 R16.1 R19.1 R23.1 R24.1 R30.1 R31.1 R39.1 R40.1 R46.2 R49.1 R50.1 TC_RET.GND TC_SEND_JACK.P$1 U1.11 U2.11 U3.11 U4.11 U5.11 U6.11 U7.11 U8.11 U9.2 U$2.GND U$5.GND U$5.VSS U$6.GND U$6.VSS VOLUM6.P$4 VOLUM6.P$5 VOLUME1.P$4 VOLUME1.P$5 VOLUME2.P$4 VOLUME2.P$5 VOLUME3.P$4 VOLUME3.P$5 VOLUME4.P$4 VOLUME4.P$5 VOLUME5.P$4 VOLUME5.P$5
HOT_SEND: C26.+ R48.2 U4.5
L_COLD: C12.+ OUT_L.P$3 R41.2
L_HOT: C21.+ OUT_L.P$2 R42.2
MASTER_MON_L: U$6.D2 VOLUM6.P$3 VOLUME1.P$8
MASTER_MON_R: U$6.D1 VOLUM6.P$8 VOLUME1.P$3
MIX1: 1:LEVEL.P$2 U1.3
MIX2: 2:LEVEL.P$2 U1.5
MIX3: 3:LEVEL.P$2 U1.10
MIX_OUT: C14.- R8.2 R18.2 U1.13 U1.14 U8.3 U8.5
MON: R53.1 U4.7 VOLUME5.P$3
MON_COLD: C25.+ MON_IN.P$3 MON_THROUGH.P$3 R58.2
MON_HOT: C32.+ MON_IN.P$2 MON_THROUGH.P$2 R57.2
MON_OUT_L: C35.1 MON_OUT.P$2 R55.1 U7.1
MON_OUT_R: C38.1 MON_OUT.P$3 R61.1 U7.7
N$1: R1.1 R2.2 U2.9
N$2: R6.1 U2.10
N$3: R1.2 R5.2 U2.8
N$4: U1.1 U1.2 U1.6 U1.7 U1.8 U1.9 U1.12
N$5: R3.1 R4.2 U2.13
N$6: R4.1 R7.2 U2.14
N$7: C8.+ R5.1
N$8: C9.+ R7.1
N$9: C1.- C3.- R16.2
N$10: R21.1 U3.3
N$12: C2.- C4.- R19.2
N$13: R22.2 R28.2 U3.1
N$14: C6.- C8.- R23.2
N$15: C7.- C9.- R24.2
N$16: R22.1 R25.2 U3.2
N$17: R26.1 R27.2 U3.6
N$18: R27.1 R29.2 U3.7
N$19: C5.- C21.- R30.2
N$20: C10.- C12.- R31.2
N$21: C5.+ R28.1
N$22: C10.+ R29.1
N$23: GAIN1.A GAIN1.S R13.1
N$24: R32.1 U3.10
N$25: C11.- C25.- R49.2
N$26: C15.- C16.- R9.2
N$27: C26.- C32.- R50.2
N$28: C16.+ R10.2 R12.2
N$29: C17.2 GAIN1.E R11.2 U2.2
N$30: C19.2 GAIN2.E R14.2 U2.6
N$31: GAIN2.A GAIN2.S R15.1
N$32: C18.+ R13.2
N$33: R12.1 U2.3
N$34: GAIN4.A GAIN4.S R62.1
N$35: C20.+ R15.2
N$36: R18.1 U2.5
N$37: BLEND1.P$8 C19.1 R14.1 U2.7
N$38: R33.2 R37.2 U3.8
N$39: R33.1 R34.2 U3.9
N$40: R35.1 R36.2 U3.13
N$41: R36.1 R38.2 U3.14
N$42: C13.- C23.- R39.2
N$43: C22.- C24.- R40.2
N$44: C13.+ R37.1
N$45: C22.+ R38.1
N$46: GAIN5.E R51.2 R52.2 R54.1 U4.1 U4.2
N$47: C34.1 R51.1
N$48: C34.2 R52.1 R53.2 R56.1 U4.6
N$49: U4.8 U4.9 U6.1 U6.2 U6.10
N$50: GAIN5.S R56.2
N$51: MONO.P$1 U6.3 VOLUM6.P$2
N$52: U4.13 U4.14 U6.6 U6.7 U6.12
N$53: U5.3 VOLUME2.P$2
N$54: U5.5 VOLUME3.P$2
N$55: U5.10 VOLUME4.P$2
N$56: U5.12 VOLUME5.P$2
N$57: U4.10 U4.12 U5.1 U5.2 U5.6 U5.7 U5.8 U5.9 U5.13 U5.14
N$58: MONO.P$2 U6.5
N$59: R63.2 U6.13 U6.14
N$60: R60.2 U6.8 U6.9
N$62: GAIN3.A GAIN3.S R59.1
N$63: C33.+ R59.2
N$64: R60.1 U7.3
N$65: U8.1 U8.2 U$6.S1B
N$66: C38.2 GAIN4.E R61.2 U7.6
N$67: C35.2 GAIN3.E R55.2 U7.2
N$68: C36.+ R62.2
N$69: R63.1 U7.5
N$70: D1.A U9.3
N$71: U8.6 U8.7 U$6.S2B
N$72: MONO.P$3 VOLUM6.P$7
N$73: C28.1 R45.2 R46.1 U7.12
N$74: LD1.CR U$5.S4B
N$75: LD1.CX U$5.S4A
N$76: R64.1 U$5.D4
N$79: C27.+ U9.1 U$10.P$1
N$81: D2.A PWR$1.P$1
OUT_L: R21.2 R26.2 VOLUME1.P$7
OUT_R: R32.2 R35.2 VOLUME1.P$2
R_COLD: C24.+ OUT_R.P$3 R43.2
R_HOT: C23.+ OUT_R.P$2 R44.2
RET: C15.+ LOOPMASTER.P$2
RET1: 1:LEVEL.P$3 U$5.D1
RET2: 2:LEVEL.P$3 U$5.D2
RET3: 3:LEVEL.P$3 U$5.D3
SELECT: BYPASS.P$2 R65.2 U$2.HOT U$5.IN1 U$5.IN2 U$5.IN3 U$5.IN4 U$6.IN1 U$6.IN2
SND: C14.+ LOOPMASTER.P$3
SND_RET_OUT: BLEND1.P$1 C17.1 R11.1 U2.1
TC_BALANCED: BLEND1.P$2 BLEND1.P$7 R3.2 R6.2 U8.10 U8.12
TC_BYPASS_L: TC_RET.BPSR U8.8 U8.9
TC_BYPASS_R: TC_RET.BPSL U8.13 U8.14
TC_COLD: C7.+ TC_SEND_JACK.P$3
TC_HOT: C6.+ TC_SEND_JACK.P$2
TC_RET_L: C1.+ TC_RET.LEFT
TC_RET_R: C2.+ TC_RET.RIGHT
TC_WET_L: C3.+ R17.2 U$6.S1A
TC_WET_R: C4.+ R20.2 U$6.S2A
VDD: 1:BLEND.P$3 1:BLEND.P$6 1:LEVEL.P$1 1:R10.1 1:R16.1 1:R17.1 1:R21.2 2:BLEND.P$3 2:BLEND.P$6 2:LEVEL.P$1 2:R10.1 2:R16.1 2:R17.1 2:R21.2 3:BLEND.P$3 3:BLEND.P$6 3:LEVEL.P$1 3:R10.1 3:R16.1 3:R17.1 3:R21.2 BLEND1.P$3 BLEND1.P$6 C37.1 R2.1 R10.1 R17.1 R20.1 R25.1 R34.1 R47.1 R48.1 R54.2 U2.12 U3.5 U3.12 U7.13 U7.14 VOLUM6.P$1 VOLUM6.P$6 VOLUME1.P$1 VOLUME1.P$6 VOLUME2.P$1 VOLUME3.P$1 VOLUME4.P$1 VOLUME5.P$1
WET1: 1:BLEND.P$2 1:BLEND.P$7 U$5.S1A
WET2: 2:BLEND.P$2 2:BLEND.P$7 U$5.S2A
WET3: 3:BLEND.P$2 3:BLEND.P$7 U$5.S3A

## Tracks (layer width: path | path; a pad name or v marks a point on that pad's centre or on a via)
1:COLD_IN  (2 unrouted)
1:COLD_SEND  (2 unrouted)
1:HOT_IN  (2 unrouted)
1:HOT_SEND  (2 unrouted)
1:N$1  (1 unrouted)
1:N$2  (1 unrouted)
1:N$3  (2 unrouted)
1:N$4  (2 unrouted)
1:N$9  (5 unrouted)
1:N$11  (1 unrouted)
1:N$12  (4 unrouted)
1:N$14  (2 unrouted)
1:N$15  (2 unrouted)
1:N$17  (1 unrouted)
1:N$23  (2 unrouted)
1:N$24  (1 unrouted)
1:N$25  (1 unrouted)
1:N$26  (2 unrouted)
1:N$27  (1 unrouted)
1:N$28  (2 unrouted)
1:N$29  (3 unrouted)
1:N$30  (3 unrouted)
1:N$33  (1 unrouted)
1:N$36  (1 unrouted)
1:N$37  (3 unrouted)
1:SND_RET_OUT  (3 unrouted)
2:COLD_IN  (2 unrouted)
2:COLD_SEND  (2 unrouted)
2:HOT_IN  (2 unrouted)
2:HOT_SEND  (2 unrouted)
2:N$1  (1 unrouted)
2:N$2  (1 unrouted)
2:N$3  (2 unrouted)
2:N$4  (2 unrouted)
2:N$9  (5 unrouted)
2:N$11  (1 unrouted)
2:N$12  (4 unrouted)
2:N$14  (2 unrouted)
2:N$15  (2 unrouted)
2:N$17  (1 unrouted)
2:N$23  (2 unrouted)
2:N$24  (1 unrouted)
2:N$25  (1 unrouted)
2:N$26  (2 unrouted)
2:N$27  (1 unrouted)
2:N$28  (2 unrouted)
2:N$29  (3 unrouted)
2:N$30  (3 unrouted)
2:N$33  (1 unrouted)
2:N$36  (1 unrouted)
2:N$37  (3 unrouted)
2:SND_RET_OUT  (3 unrouted)
3:COLD_IN  (2 unrouted)
3:COLD_SEND  (2 unrouted)
3:HOT_IN  (2 unrouted)
3:HOT_SEND  (2 unrouted)
3:N$1  (1 unrouted)
3:N$2  (1 unrouted)
3:N$3  (2 unrouted)
3:N$4  (2 unrouted)
3:N$9  (5 unrouted)
3:N$11  (1 unrouted)
3:N$12  (4 unrouted)
3:N$14  (2 unrouted)
3:N$15  (2 unrouted)
3:N$17  (1 unrouted)
3:N$23  (2 unrouted)
3:N$24  (1 unrouted)
3:N$25  (1 unrouted)
3:N$26  (2 unrouted)
3:N$27  (1 unrouted)
3:N$28  (2 unrouted)
3:N$29  (3 unrouted)
3:N$30  (3 unrouted)
3:N$33  (1 unrouted)
3:N$36  (1 unrouted)
3:N$37  (3 unrouted)
3:SND_RET_OUT  (3 unrouted)
+9V  (21 unrouted)
+48V  (14 unrouted)
COLD_SEND  (2 unrouted)
DRY1  (5 unrouted)
DRY2  (5 unrouted)
DRY3  (5 unrouted)
GND  (103 unrouted)
HOT_SEND  (2 unrouted)
L_COLD  (2 unrouted)
L_HOT  (2 unrouted)
MASTER_MON_L  (2 unrouted)
MASTER_MON_R  (2 unrouted)
MIX1  (1 unrouted)
MIX2  (1 unrouted)
MIX3  (1 unrouted)
MIX_OUT  (6 unrouted)
MON  (2 unrouted)
MON_COLD  (3 unrouted)
MON_HOT  (3 unrouted)
MON_OUT_L  (3 unrouted)
MON_OUT_R  (3 unrouted)
N$1  (2 unrouted)
N$2  (1 unrouted)
N$3  (2 unrouted)
N$4  (6 unrouted)
N$5  (2 unrouted)
N$6  (2 unrouted)
N$7  (1 unrouted)
N$8  (1 unrouted)
N$9  (2 unrouted)
N$10  (1 unrouted)
N$12  (2 unrouted)
N$13  (2 unrouted)
N$14  (2 unrouted)
N$15  (2 unrouted)
N$16  (2 unrouted)
N$17  (2 unrouted)
N$18  (2 unrouted)
N$19  (2 unrouted)
N$20  (2 unrouted)
N$21  (1 unrouted)
N$22  (1 unrouted)
N$23  (2 unrouted)
N$24  (1 unrouted)
N$25  (2 unrouted)
N$26  (2 unrouted)
N$27  (2 unrouted)
N$28  (2 unrouted)
N$29  (3 unrouted)
N$30  (3 unrouted)
N$31  (2 unrouted)
N$32  (1 unrouted)
N$33  (1 unrouted)
N$34  (2 unrouted)
N$35  (1 unrouted)
N$36  (1 unrouted)
N$37  (3 unrouted)
N$38  (2 unrouted)
N$39  (2 unrouted)
N$40  (2 unrouted)
N$41  (2 unrouted)
N$42  (2 unrouted)
N$43  (2 unrouted)
N$44  (1 unrouted)
N$45  (1 unrouted)
N$46  (5 unrouted)
N$47  (1 unrouted)
N$48  (4 unrouted)
N$49  (4 unrouted)
N$50  (1 unrouted)
N$51  (2 unrouted)
N$52  (4 unrouted)
N$53  (1 unrouted)
N$54  (1 unrouted)
N$55  (1 unrouted)
N$56  (1 unrouted)
N$57  (9 unrouted)
N$58  (1 unrouted)
N$59  (2 unrouted)
N$60  (2 unrouted)
N$62  (2 unrouted)
N$63  (1 unrouted)
N$64  (1 unrouted)
N$65  (2 unrouted)
N$66  (3 unrouted)
N$67  (3 unrouted)
N$68  (1 unrouted)
N$69  (1 unrouted)
N$70  (1 unrouted)
N$71  (2 unrouted)
N$72  (1 unrouted)
N$73  (3 unrouted)
N$74  (1 unrouted)
N$75  (1 unrouted)
N$76  (1 unrouted)
N$79  (2 unrouted)
N$81  (1 unrouted)
OUT_L  (2 unrouted)
OUT_R  (2 unrouted)
R_COLD  (2 unrouted)
R_HOT  (2 unrouted)
RET  (1 unrouted)
RET1  (1 unrouted)
RET2  (1 unrouted)
RET3  (1 unrouted)
SELECT  (8 unrouted)
SND  (1 unrouted)
SND_RET_OUT  (3 unrouted)
TC_BALANCED  (5 unrouted)
TC_BYPASS_L  (2 unrouted)
TC_BYPASS_R  (2 unrouted)
TC_COLD  (1 unrouted)
TC_HOT  (1 unrouted)
TC_RET_L  (1 unrouted)
TC_RET_R  (1 unrouted)
TC_WET_L  (2 unrouted)
TC_WET_R  (2 unrouted)
VDD  (45 unrouted)
WET1  (2 unrouted)
WET2  (2 unrouted)
WET3  (2 unrouted)

## Text on the board
tPlace: Power | TC return | TC send | Input 1 | Input 2 | Input 3 | Chanel 1 | Chanel 2 | Chanel 3 | Monitor | Gain | Gain | Gain | Monitor in | Loop 1 | Right Out | Master | Mon in / gain | Blend | Blend | Blend | Blend | Left Out | Gain | Gain | Gain | Gain | Mon out / gain | Wet | Wet | Wet | Wet | L | Loop 2 | Left Out | Monitor | Monitor | Monitor | Monitor | Dry | Dry | Dry | Dry | R | Level | Level | Level | Master | Loop 3 | Monitor in | Monitor Through | W | ret | D | M | ret | S | Mono | Bypass | Loop master | Monitor Through | Monitor out